# Altium PCB Skumpad.PcbDoc
Units mm, origin at the board's own origin, x right, y up, seen from the top; angles counter-clockwise.
Board outline 102 x 102 mm, 2 copper layers (Top Layer, Bottom Layer); 93 components, 46 nets, 234 pads, 0 vias.
Unrouted connection lines stored in the file: 120.
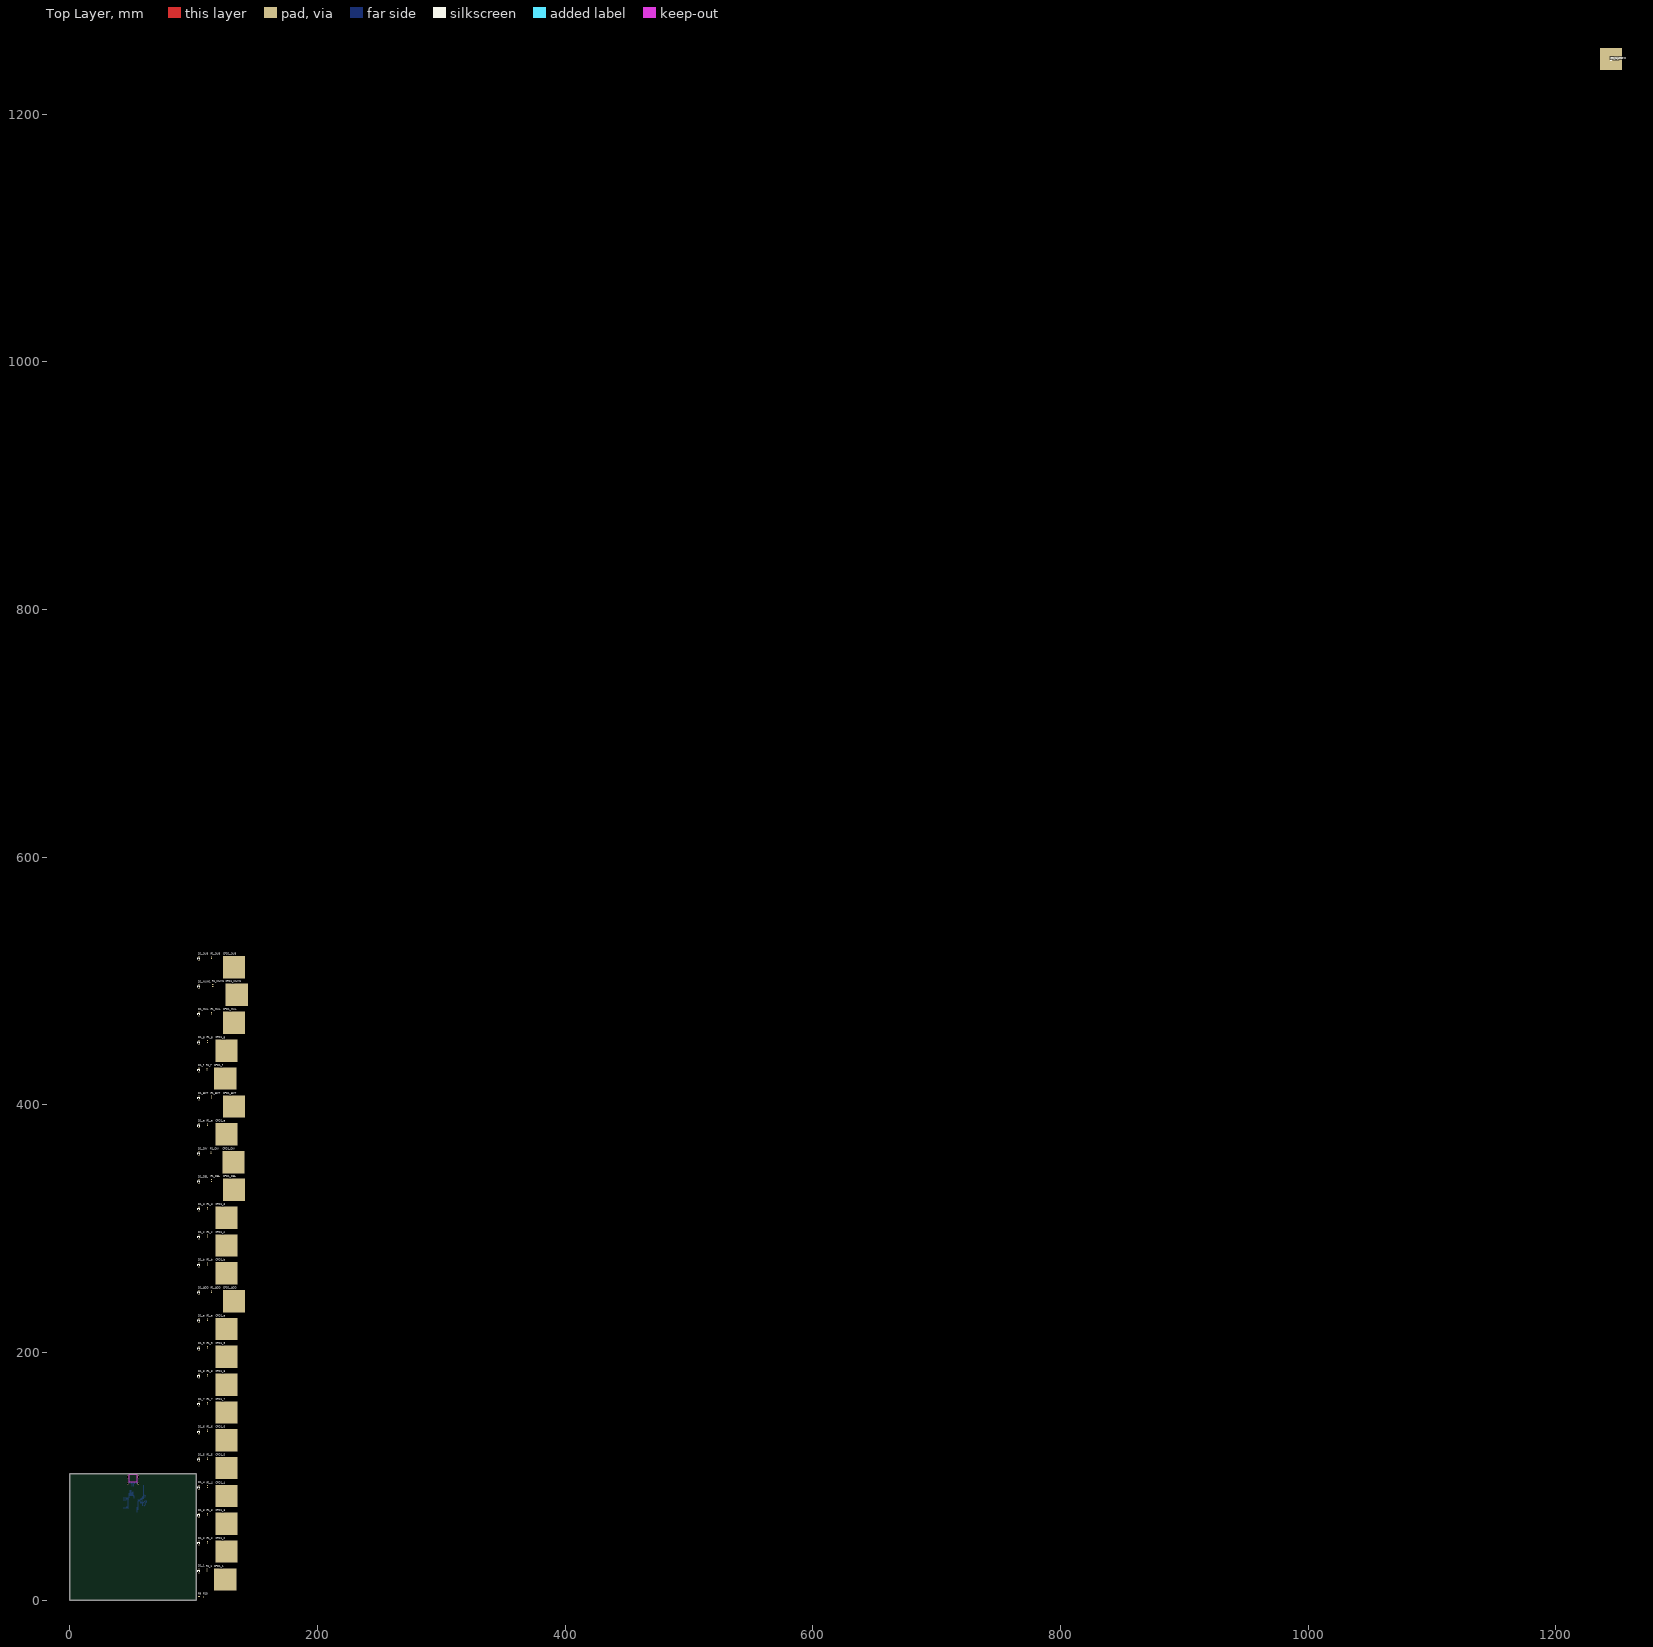
[diagram p0: Top Layer view]
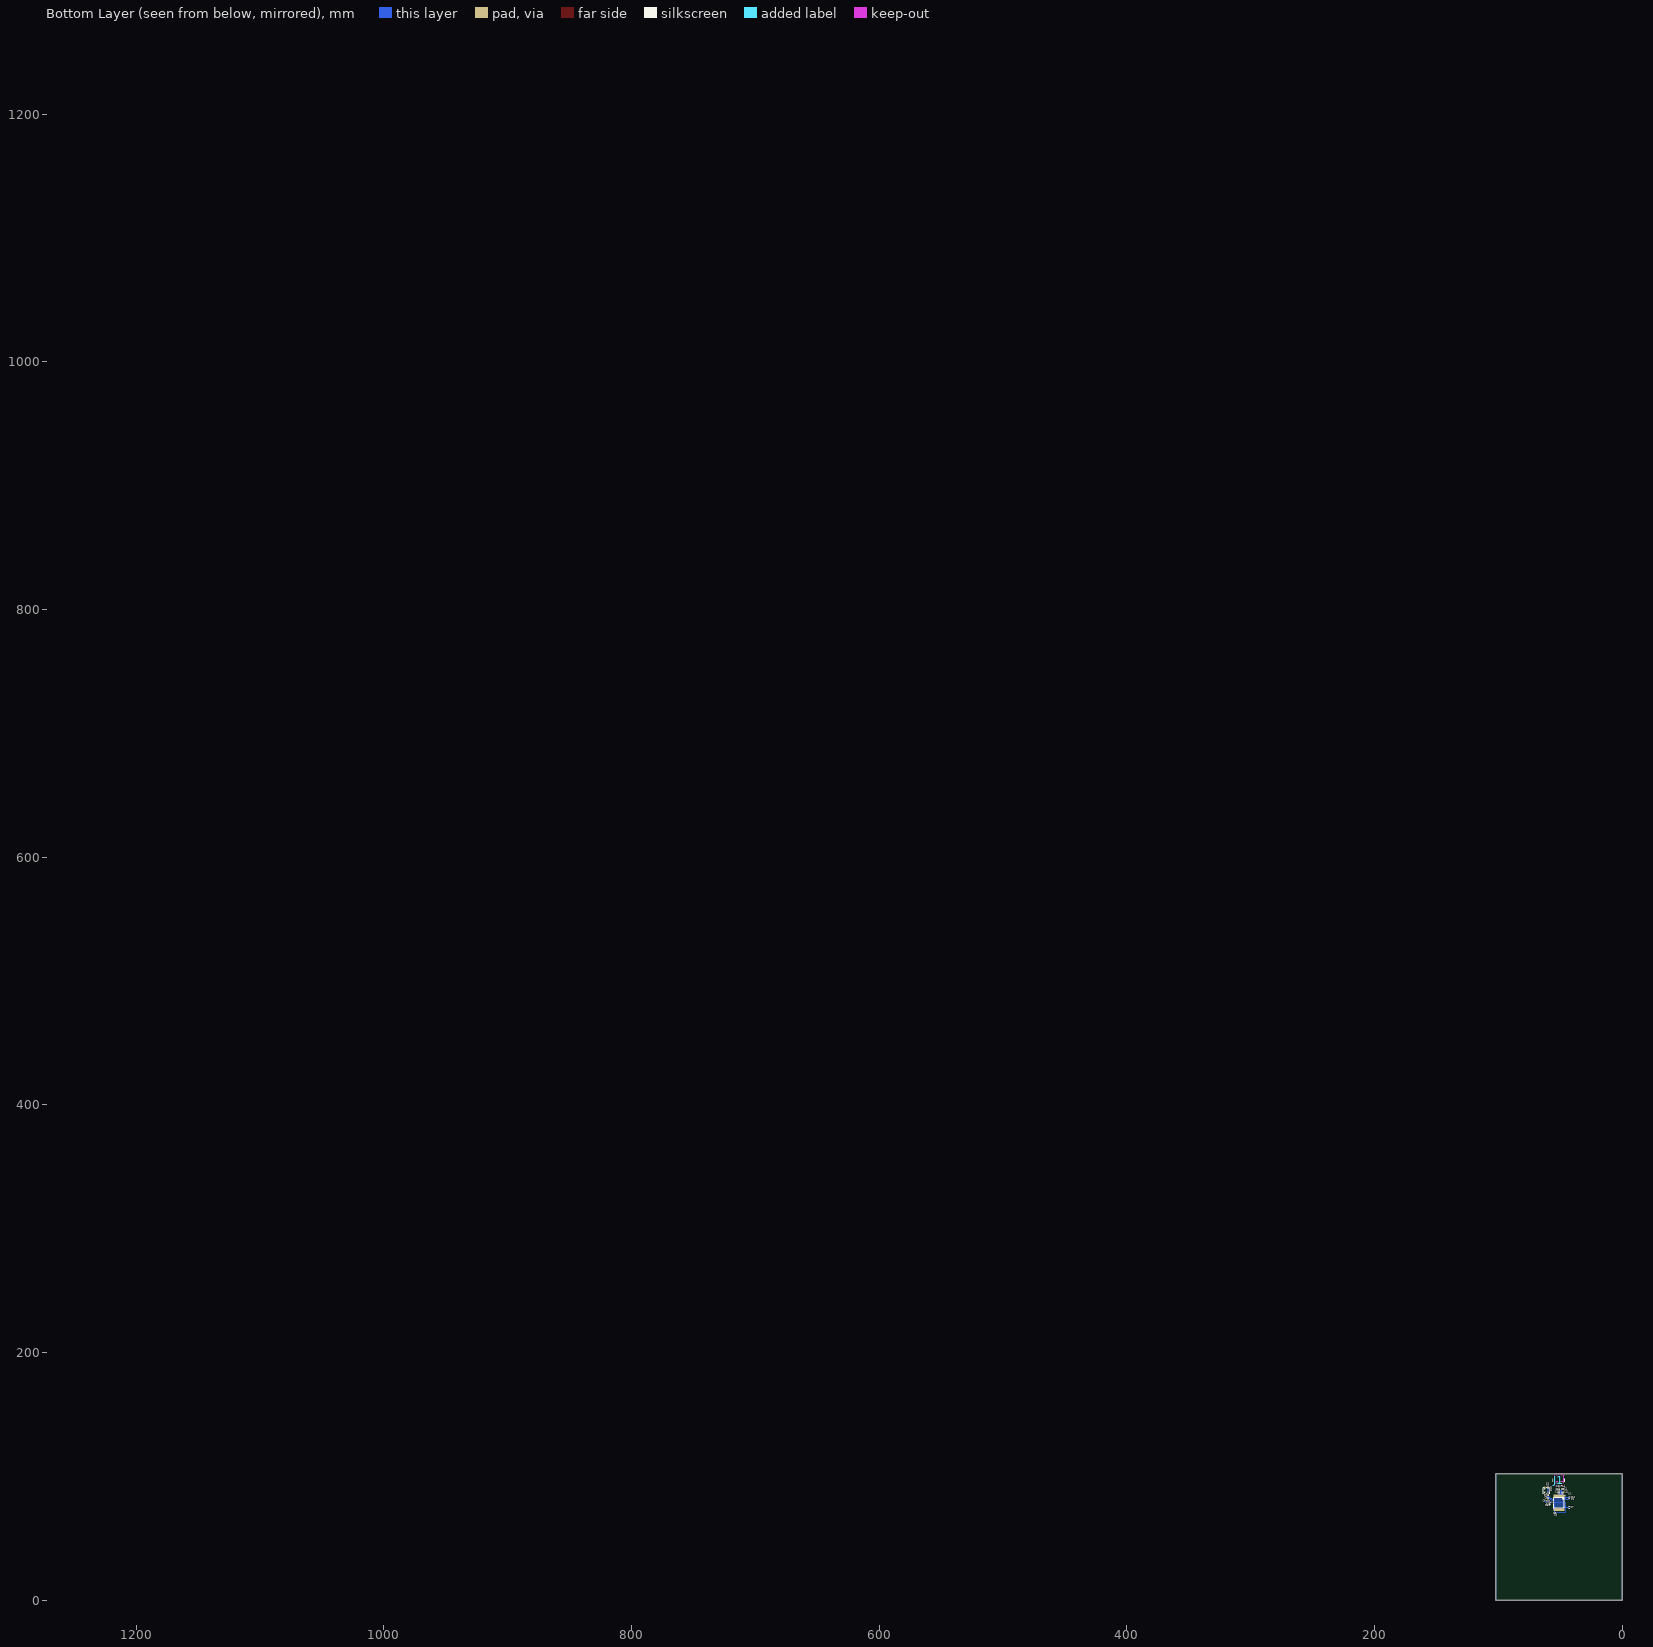
[diagram p1: Bottom Layer view, seen from below]

## Layer stack, top to bottom
Top Solder: solder mask 0.0102, Solder Resist, Dk 3.5
Top Layer: signal copper 0.0356
Dielectric 1: dielectric 0.32, FR-4, Dk 4.8
Bottom Layer: signal copper 0.0356
Bottom Solder: solder mask 0.0102, Solder Resist, Dk 3.5

## Board outline
0,0 0,102 102,102 102,0

## Design rules (kind name [scope] priority, off if disabled: settings)
Clearance [All] p1: gap=0.127 ignorepadtopadclearanceinfootprint=TRUE except(0: Arc-Hole Track-Hole SMDPad-Hole THPad-Hole Via-Hole Fill-Hole Poly-Hole Region-Hole Text-Hole; 0.254: SMDPad-SMDPad)
PolygonConnect [All] p1: connectstyle=Relief reliefconductorwidth=0.254 reliefentries=4 polygonreliefangle="90 Angle" airgapwidth=0.254
RoomDefinition SUB [InComponentClass('SUB')] p1: confinementstyle=ConfineIn formatcopy=TRUE lockcomponents=FALSE outline 103.1,501.999 141.8,501.999 141.8,523.299 103.1,523.299
RoomDefinition NUM2 [InComponentClass('NUM2')] p2: confinementstyle=ConfineIn formatcopy=TRUE lockcomponents=FALSE outline 1235.397,1235.397 1257.997,1235.397 1257.997,1253.797 1235.397,1253.797
RoomDefinition NUM1 [InComponentClass('NUM1')] p3: confinementstyle=ConfineIn formatcopy=TRUE lockcomponents=FALSE outline 103.1,479.599 143.9,479.599 143.9,500.799 103.1,500.799
RoomDefinition MUL [InComponentClass('MUL')] p4: confinementstyle=ConfineIn formatcopy=TRUE lockcomponents=FALSE outline 103.1,457.099 141.8,457.099 141.8,478.299 103.1,478.299
RoomDefinition g [InComponentClass('g')] p5: confinementstyle=ConfineIn formatcopy=TRUE lockcomponents=FALSE outline 103.1,434.399 135.7,434.399 135.7,455.799 103.1,455.799
RoomDefinition f [InComponentClass('f')] p6: confinementstyle=ConfineIn formatcopy=TRUE lockcomponents=FALSE outline 103.1,411.999 134.7,411.999 134.7,433.199 103.1,433.199
RoomDefinition ENT [InComponentClass('ENT')] p7: confinementstyle=ConfineIn formatcopy=TRUE lockcomponents=FALSE outline 103.1,389.499 141.8,389.499 141.8,410.699 103.1,410.699
RoomDefinition e [InComponentClass('e')] p8: confinementstyle=ConfineIn formatcopy=TRUE lockcomponents=FALSE outline 103.1,366.999 135.7,366.999 135.7,388.199 103.1,388.199
RoomDefinition DIV [InComponentClass('DIV')] p9: confinementstyle=ConfineIn formatcopy=TRUE lockcomponents=FALSE outline 103.1,344.499 141.3,344.499 141.3,365.799 103.1,365.799
RoomDefinition DEL [InComponentClass('DEL')] p10: confinementstyle=ConfineIn formatcopy=TRUE lockcomponents=FALSE outline 103.1,322.099 141.8,322.099 141.8,343.299 103.1,343.299
RoomDefinition d [InComponentClass('d')] p11: confinementstyle=ConfineIn formatcopy=TRUE lockcomponents=FALSE outline 103.1,299.599 135.7,299.599 135.7,320.799 103.1,320.799
RoomDefinition c [InComponentClass('c')] p12: confinementstyle=ConfineIn formatcopy=TRUE lockcomponents=FALSE outline 103.1,277.099 135.7,277.099 135.7,298.399 103.1,298.399
RoomDefinition b [InComponentClass('b')] p13: confinementstyle=ConfineIn formatcopy=TRUE lockcomponents=FALSE outline 103.1,254.699 135.7,254.699 135.7,275.899 103.1,275.899
RoomDefinition ADD [InComponentClass('ADD')] p14: confinementstyle=ConfineIn formatcopy=TRUE lockcomponents=FALSE outline 103.1,232.199 141.8,232.199 141.8,253.399 103.1,253.399
RoomDefinition a [InComponentClass('a')] p15: confinementstyle=ConfineIn formatcopy=TRUE lockcomponents=FALSE outline 103.1,209.7 135.7,209.7 135.7,230.899 103.1,230.899
RoomDefinition 9 [InComponentClass('9')] p16: confinementstyle=ConfineIn formatcopy=TRUE lockcomponents=FALSE outline 103.1,187.3 135.7,187.3 135.7,208.5 103.1,208.5
RoomDefinition 8 [InComponentClass('8')] p17: confinementstyle=ConfineIn formatcopy=TRUE lockcomponents=FALSE outline 103.1,164.8 135.7,164.8 135.7,186 103.1,186
RoomDefinition 7 [InComponentClass('7')] p18: confinementstyle=ConfineIn formatcopy=TRUE lockcomponents=FALSE outline 103.1,142.3 135.7,142.3 135.7,163.5 103.1,163.5
RoomDefinition 6 [InComponentClass('6')] p19: confinementstyle=ConfineIn formatcopy=TRUE lockcomponents=FALSE outline 103.1,119.8 135.7,119.8 135.7,141.1 103.1,141.1
RoomDefinition 5 [InComponentClass('5')] p20: confinementstyle=ConfineIn formatcopy=TRUE lockcomponents=FALSE outline 103.1,97.4 135.7,97.4 135.7,118.6 103.1,118.6
RoomDefinition 4 [InComponentClass('4')] p21: confinementstyle=ConfineIn formatcopy=TRUE lockcomponents=FALSE outline 103.1,74.9 135.7,74.9 135.7,96.1 103.1,96.1
RoomDefinition 3 [InComponentClass('3')] p22: confinementstyle=ConfineIn formatcopy=TRUE lockcomponents=FALSE outline 103.1,52.4 135.7,52.4 135.7,73.7 103.1,73.7
RoomDefinition 2 [InComponentClass('2')] p23: confinementstyle=ConfineIn formatcopy=TRUE lockcomponents=FALSE outline 103.1,30 135.7,30 135.7,51.2 103.1,51.2
RoomDefinition 1 [InComponentClass('1')] p24: confinementstyle=ConfineIn formatcopy=TRUE lockcomponents=FALSE outline 103.1,7.5 134.7,7.5 134.7,28.7 103.1,28.7
RoomDefinition Skumpad [InComponentClass('Skumpad')] p25: confinementstyle=ConfineIn formatcopy=TRUE lockcomponents=FALSE outline 103.2,1.5 352.399,1.5 352.399,18.8 103.2,18.8
RoutingVias [All] p1: holewidth=0.711 width=1.27 viastyle="Through Hole" minholewidth=0.711 minwidth=1.27 maxholewidth=0.711 maxwidth=1.27
SolderMaskExpansion [All] p1: expansion=0.102 istentingtop=FALSE
Width Width_1 [All] p1: maxlimit=1.27 minlimit=0.127 preferedwidth=0.254 minimp=50.000000 maximp=50.000000 favimp=50.000000
30 further rules are at their usual default settings.

## Classes and differential pairs
channel class CSensor: 1 2 3 4 5 6 7 8 9 a ADD b c d DEL DIV e ENT f g MUL NUM1 NUM2 SUB
component class SUB: CPD1_SUB D1_SUB R1_SUB
component class NUM2: CPD1_NUM2 D1_NUM2 R1_NUM2
component class NUM1: CPD1_NUM1 D1_NUM1 R1_NUM1
component class MUL: CPD1_MUL D1_MUL R1_MUL
component class g: CPD1_g D1_g R1_g
component class f: CPD1_f D1_f R1_f
component class e: CPD1_e D1_e R1_e
component class ENT: CPD1_ENT D1_ENT R1_ENT
component class d: CPD1_d D1_d R1_d
component class DIV: CPD1_DIV D1_DIV R1_DIV
component class DEL: CPD1_DEL D1_DEL R1_DEL
component class c: CPD1_c D1_c R1_c
component class b: CPD1_b D1_b R1_b
component class a: CPD1_a D1_a R1_a
component class ADD: CPD1_ADD D1_ADD R1_ADD
component class 9: CPD1_9 D1_9 R1_9
component class 8: CPD1_8 D1_8 R1_8
component class 7: CPD1_7 D1_7 R1_7
component class 6: CPD1_6 D1_6 R1_6
component class 5: CPD1_5 D1_5 R1_5
component class 4: CPD1_4 D1_4 R1_4
component class 3: CPD1_3 D1_3 R1_3
component class 2: CPD1_2 D1_2 R1_2
component class 1: CPD1_1 D1_1 R1_1
component class Skumpad: 1 C1 C2 C3 C4 C5 C6 C7 C8 C9 C10 C11 C12 J1 R7 R9 R10 R12 R14 SW1 U1

## Components (designator, comment, footprint, x,y, rotation, side; value= is the part's Value field where it differs from the comment)
1 "16MCR" XTAL16M 59.865,79.179 r90 bottom
C1 "100nF" CAPC1050X55X23ML05T13 42.515,81.021 r0 bottom
C2 "100nF" CAPC1050X55X23ML05T13 60.291,92.886 r0 bottom
C3 "47pF" FP-C0402-BB-MFG 51,89.26 r270 bottom value="47 pF"
C4 "47pF" FP-C0402-BB-MFG 47.721,89.66 r90 bottom value="47 pF"
C5 "22pF" CAPC1005X56X25NL10T15 62.09,79.831 r270 bottom
C6 "22pF" CAPC1005X56X25NL10T15 59.422,76.343 r180 bottom
C7 "100nF" FP-C0402-BB-MFG 42.769,74.598 r180 bottom value="0.10 μF"
C8 "100nF" FP-C0402-BB-MFG 54.206,70.348 r270 bottom value="0.10 μF"
C9 "100nF" FP-C0402-BB-MFG 59.865,82.169 r0 bottom value="0.10 μF"
C10 "100nF" FP-C0402-BB-MFG 50.987,86.899 r90 bottom value="0.10 μF"
C11 "100nF" FP-C0402-BB-MFG 47.824,86.876 r90 bottom value="0.10 μF"
C12 "100nF" FP-C0402-BB-MFG 42.705,82.615 r180 bottom value="0.10 μF"
CPD1_1 "CPAD" CPAD 125.5,16.7 r0 top (schematic designator CPD1)
CPD1_2 "CPAD" CPAD 126.5,39.2 r0 top (schematic designator CPD1)
CPD1_3 "CPAD" CPAD 126.5,61.6 r0 top (schematic designator CPD1)
CPD1_4 "CPAD" CPAD 126.5,84.1 r0 top (schematic designator CPD1)
CPD1_5 "CPAD" CPAD 126.5,106.6 r0 top (schematic designator CPD1)
CPD1_6 "CPAD" CPAD 126.5,129 r0 top (schematic designator CPD1)
CPD1_7 "CPAD" CPAD 126.5,151.5 r0 top (schematic designator CPD1)
CPD1_8 "CPAD" CPAD 126.5,174 r0 top (schematic designator CPD1)
CPD1_9 "CPAD" CPAD 126.5,196.5 r0 top (schematic designator CPD1)
CPD1_a "CPAD" CPAD 126.5,218.9 r0 top (schematic designator CPD1)
CPD1_ADD "CPAD" CPAD 132.6,241.399 r0 top (schematic designator CPD1)
CPD1_b "CPAD" CPAD 126.5,263.899 r0 top (schematic designator CPD1)
CPD1_c "CPAD" CPAD 126.5,286.299 r0 top (schematic designator CPD1)
CPD1_d "CPAD" CPAD 126.5,308.799 r0 top (schematic designator CPD1)
CPD1_DEL "CPAD" CPAD 132.6,331.299 r0 top (schematic designator CPD1)
CPD1_DIV "CPAD" CPAD 132.1,353.699 r0 top (schematic designator CPD1)
CPD1_e "CPAD" CPAD 126.5,376.199 r0 top (schematic designator CPD1)
CPD1_ENT "CPAD" CPAD 132.6,398.699 r0 top (schematic designator CPD1)
CPD1_f "CPAD" CPAD 125.5,421.199 r0 top (schematic designator CPD1)
CPD1_g "CPAD" CPAD 126.5,443.599 r0 top (schematic designator CPD1)
CPD1_MUL "CPAD" CPAD 132.6,466.299 r0 top (schematic designator CPD1)
CPD1_NUM1 "CPAD" CPAD 134.7,488.799 r0 top (schematic designator CPD1)
CPD1_NUM2 "CPAD" CPAD 1244.587,1244.587 r0 top (schematic designator CPD1)
CPD1_SUB "CPAD" CPAD 132.6,511.199 r0 top (schematic designator CPD1)
D1_1 "1N4148WS" DIOD-SOD123-2_V 104.2,23.6 r90 top (schematic designator D1)
D1_2 "1N4148WS" DIOD-SOD123-2_V 104.2,46 r90 top (schematic designator D1)
D1_3 "1N4148WS" DIOD-SOD123-2_V 104.2,68.5 r90 top (schematic designator D1)
D1_4 "1N4148WS" DIOD-SOD123-2_V 104.2,91 r90 top (schematic designator D1)
D1_5 "1N4148WS" DIOD-SOD123-2_V 104.2,113.4 r90 top (schematic designator D1)
D1_6 "1N4148WS" DIOD-SOD123-2_V 104.2,135.9 r90 top (schematic designator D1)
D1_7 "1N4148WS" DIOD-SOD123-2_V 104.2,158.4 r90 top (schematic designator D1)
D1_8 "1N4148WS" DIOD-SOD123-2_V 104.2,180.8 r90 top (schematic designator D1)
D1_9 "1N4148WS" DIOD-SOD123-2_V 104.2,203.3 r90 top (schematic designator D1)
D1_a "1N4148WS" DIOD-SOD123-2_V 104.2,225.799 r90 top (schematic designator D1)
D1_ADD "1N4148WS" DIOD-SOD123-2_V 104.2,248.299 r90 top (schematic designator D1)
D1_b "1N4148WS" DIOD-SOD123-2_V 104.2,270.699 r90 top (schematic designator D1)
D1_c "1N4148WS" DIOD-SOD123-2_V 104.2,293.199 r90 top (schematic designator D1)
D1_d "1N4148WS" DIOD-SOD123-2_V 104.2,315.699 r90 top (schematic designator D1)
D1_DEL "1N4148WS" DIOD-SOD123-2_V 104.2,338.099 r90 top (schematic designator D1)
D1_DIV "1N4148WS" DIOD-SOD123-2_V 104.2,360.599 r90 top (schematic designator D1)
D1_e "1N4148WS" DIOD-SOD123-2_V 104.2,383.099 r90 top (schematic designator D1)
D1_ENT "1N4148WS" DIOD-SOD123-2_V 104.2,405.499 r90 top (schematic designator D1)
D1_f "1N4148WS" DIOD-SOD123-2_V 104.2,427.999 r90 top (schematic designator D1)
D1_g "1N4148WS" DIOD-SOD123-2_V 104.2,450.399 r90 top (schematic designator D1)
D1_MUL "1N4148WS" DIOD-SOD123-2_V 104.2,473.199 r90 top (schematic designator D1)
D1_NUM1 "1N4148WS" DIOD-SOD123-2_V 104.2,495.599 r90 top (schematic designator D1)
D1_NUM2 "1N4148WS" DIOD-SOD123-2_V 1244.587,1244.587 r0 top (schematic designator D1)
D1_SUB "1N4148WS" DIOD-SOD123-2_V 104.2,518.099 r90 top (schematic designator D1)
J1 "USBC" FP-1054500101-MFG 51,97.536 r0 bottom
R1_1 "560K" RESC1608X55X30NL15T15 110.7,24.3 r90 top (schematic designator R1)
R1_2 "560K" RESC1608X55X30NL15T15 111.2,46.8 r90 top (schematic designator R1)
R1_3 "560K" RESC1608X55X30NL15T15 111.2,69.3 r90 top (schematic designator R1)
R1_4 "560K" RESC1608X55X30NL15T15 111.2,91.7 r90 top (schematic designator R1)
R1_5 "560K" RESC1608X55X30NL15T15 111.2,114.2 r90 top (schematic designator R1)
R1_6 "560K" RESC1608X55X30NL15T15 111.2,136.7 r90 top (schematic designator R1)
R1_7 "560K" RESC1608X55X30NL15T15 111.2,159.1 r90 top (schematic designator R1)
R1_8 "560K" RESC1608X55X30NL15T15 111.2,181.6 r90 top (schematic designator R1)
R1_9 "560K" RESC1608X55X30NL15T15 111.2,204.1 r90 top (schematic designator R1)
R1_a "560K" RESC1608X55X30NL15T15 111.2,226.499 r90 top (schematic designator R1)
R1_ADD "560K" RESC1608X55X30NL15T15 114.3,248.999 r90 top (schematic designator R1)
R1_b "560K" RESC1608X55X30NL15T15 111.2,271.499 r90 top (schematic designator R1)
R1_c "560K" RESC1608X55X30NL15T15 111.2,293.999 r90 top (schematic designator R1)
R1_d "560K" RESC1608X55X30NL15T15 111.2,316.399 r90 top (schematic designator R1)
R1_DEL "560K" RESC1608X55X30NL15T15 114.3,338.899 r90 top (schematic designator R1)
R1_DIV "560K" RESC1608X55X30NL15T15 114,361.399 r90 top (schematic designator R1)
R1_e "560K" RESC1608X55X30NL15T15 111.2,383.799 r90 top (schematic designator R1)
R1_ENT "560K" RESC1608X55X30NL15T15 114.3,406.299 r90 top (schematic designator R1)
R1_f "560K" RESC1608X55X30NL15T15 110.7,428.799 r90 top (schematic designator R1)
R1_g "560K" RESC1608X55X30NL15T15 111.2,451.199 r90 top (schematic designator R1)
R1_MUL "560K" RESC1608X55X30NL15T15 114.3,473.899 r90 top (schematic designator R1)
R1_NUM1 "560K" RESC1608X55X30NL15T15 115.3,496.399 r90 top (schematic designator R1)
R1_NUM2 "560K" RESC1608X55X30NL15T15 1244.587,1244.587 r0 top (schematic designator R1)
R1_SUB "560K" RESC1608X55X30NL15T15 114.3,518.899 r90 top (schematic designator R1)
R7 "10K" RESC1005X40X25NL05T05 60.9,83.839 r90 bottom
R9 "5.1K" RESC1005X40X25NL10T10 104.2,3 r0 top
R10 "5.1K" RESC1005X40X25NL10T10 108.1,2.6 r90 top
R12 "22" RESC1005X40X25LL05T05 51.49,91.701 r90 bottom
R14 "22" RESC1005X40X25LL05T05 50.499,91.701 r90 bottom
SW1 "7914G-1-000E" BOUR-7914G-1-000E_V 61.1,88.4 r0 bottom
U1 "ATmega32U4-AU" 44ML_M 51,78.6 r270 bottom

## Footprints (in the part's own frame and the unit in brackets; to place one, negate y for a bottom-side part, rotate by r counter-clockwise, add the part's x,y. Pads: shape width x height; smd on the part's side, far side on the other; paste and mask are expansions set on the pad)
44ML_M [mm] "Thin QFP, 44-Leads, Body 10x10mm, Pitch 0.8mm, IPC Low Density"
  oval 2.05x0.6 smd: 1(-5.7,4) 2(-5.7,3.2) 3(-5.7,2.4) 4(-5.7,1.6) 5(-5.7,0.8) 6(-5.7,0) 7(-5.7,-0.8) 8(-5.7,-1.6) 9(-5.7,-2.4) 10(-5.7,-3.2) 11(-5.7,-4) 23(5.7,-4) 24(5.7,-3.2) 25(5.7,-2.4) 26(5.7,-1.6) 27(5.7,-0.8) 28(5.7,0) 29(5.7,0.8) 30(5.7,1.6) 31(5.7,2.4) 32(5.7,3.2) 33(5.7,4)
  oval 0.6x2.05 smd: 12(-4,-5.7) 13(-3.2,-5.7) 14(-2.4,-5.7) 15(-1.6,-5.7) 16(-0.8,-5.7) 17(0,-5.7) 18(0.8,-5.7) 19(1.6,-5.7) 20(2.4,-5.7) 21(3.2,-5.7) 22(4,-5.7) 34(4,5.7) 35(3.2,5.7) 36(2.4,5.7) 37(1.6,5.7) 38(0.8,5.7) 39(0,5.7) 40(-0.8,5.7) 41(-1.6,5.7) 42(-2.4,5.7) 43(-3.2,5.7) 44(-4,5.7)
  silkscreen extent -5.82,-4.25 4.25,4.97, body extent -5,-5 5,5, height 1.2
BOUR-7914G-1-000E_V [mm] "SMD, 4-Leads, Body 5x5mm, Height 4.49mm"
  rect 1.27x1.27 smd: 1(-1.27,2.75) 2(1.27,2.75) 3(1.27,-2.75) 4(-1.27,-2.75)
  silkscreen extent -2.5,-2.5 2.5,4.06, body extent -2.5,-3.1 2.5,3.1, height 4.11
CAPC1005X56X25NL10T15 [mm] "Chip Capacitor, 2-Leads, Body 1.00x0.50mm, IPC Medium Density"
  rect 0.68x0.64 smd: 1(-0.44,0) 2(0.44,0)
  body extent -0.55,-0.3 0.55,0.3, height 0.56
CAPC1050X55X23ML05T13 [mm] "Chip Capacitor, 2-Leads, Body 1.05x0.55mm, IPC Low Density"
  rect 0.76x0.72 smd: 1(-0.49,0) 2(0.49,0)
  body extent -0.53,-0.28 0.53,0.27, height 0.55
CPAD [mm]
  rect 18x18 smd paste-9 mask+0.102: 1(0,0)
DIOD-SOD123-2_V [mm] "SOD123, 2-Leads, Body 2.7x1.55mm, Height 1.45mm"
  rect 0.9x0.95 smd: 1(-1.575,0) 2(1.575,0)
  silkscreen extent -0.64,-0.83 0.64,0.77, body extent -1.35,-0.77 1.35,0.77, height 1.45
FP-1054500101-MFG [mm]
  rrect100% 1.1x2.1 hole 1.6 slot 0.6 at 0 deg paste-1000 mask+0: 1(-4.32,3.36) 2(4.32,3.36)
  rrect100% 1.1x2.6 hole 2.1 slot 0.6 at 0 deg paste-1000 mask+0: 3(-4.32,-2) 4(4.32,-2)
  rect 0.3x0.7 smd paste+0 mask+0: A1(-3,3.77) A2(-2.5,3.77) A3(-2,3.77) A4(-1.5,3.77) A5(-1,3.77) A6(-0.5,3.77) A7(0.5,3.77) A8(1,3.77) A9(1.5,3.77) A10(2,3.77) A11(2.5,3.77) A12(3,3.77) B2(2.25,2.47) B3(1.75,2.47) B4(1.25,2.47) B5(0.75,2.47) B6(0.25,2.47) B7(-0.25,2.47) B8(-0.75,2.47) B9(-1.25,2.47) B10(-1.75,2.47) B11(-2.25,2.47)
  rect 1x0.7 smd paste+0 mask+0: B1(3.1,2.47) B12(-3.1,2.47)
  Keep-Out Layer region: -3.5,1.88 3.5,1.88 3.5,-3.77 -3.5,-3.77
  silkscreen extent -4.57,-0.3 4.57,1.9
FP-C0402-BB-MFG [mm]
  rect 0.52x0.52 smd paste+0 mask+0: 1(-0.4,0) 2(0.4,0)
  silkscreen extent -0.5,-0.64 0.5,0.64, body extent -0.5,-0.25 0.5,0.25, height 0.55
RESC1005X40X25LL05T05 [mm] "Chip Resistor, 2-Leads, Body 1.00x0.50mm, IPC High Density"
  rect 0.45x0.45 smd: 1(-0.4,0) 2(0.4,0)
  body extent -0.53,-0.27 0.53,0.28, height 0.4
RESC1005X40X25NL05T05 [mm] "Chip Resistor, 2-Leads, Body 1.00x0.50mm, IPC Medium Density"
  rect 0.55x0.55 smd: 1(-0.45,0) 2(0.45,0)
  body extent -0.53,-0.27 0.53,0.28, height 0.4
RESC1005X40X25NL10T10 [mm] "Chip Resistor, 2-Leads, Body 1.00x0.50mm, IPC Medium Density"
  rect 0.65x0.6 smd: 1(-0.425,0) 2(0.425,0)
  body extent -0.55,-0.3 0.55,0.3, height 0.4
RESC1608X55X30NL15T15 [mm] "Chip Resistor, 2-Leads, Body 1.60x0.80mm, IPC Medium Density"
  rect 0.8x0.95 smd: 1(-0.675,0) 2(0.675,0)
  body extent -0.87,-0.48 0.87,0.48, height 0.55
XTAL16M [mm] "A 16Mhz crystal resonator footprint, JLCPCB #C13738"
  rect 1.4x1.2 smd: 1(-1.1,-0.85) 2(1.1,-0.85) 3(1.1,0.85) 4(-1.1,0.85)
  silkscreen extent -2.12,-1.78 -0.34,-0.22

## Part data
1: "16Mhz crystal resonator, JLCPCB #C13738"
C1 C2: library part CMP-2000-05439-1, "Chip Capacitor, 100 nF, +/- 10%, 16 V, -55 to 125 degC, 0402 (1005 Metric), RoHS, Tape and Reel", Capacitance=100000pF, Case Size/Dimension=0402, Dielectric=X7R, Manufacturer="Samsung Electro-Mechanics", Rated Voltage=16V, Tolerance (%)=±10%, Datasheet URL=https://datasheet.ciiva.com/29198/458718-da-01-en-vs-kondensator-0402-29198423.pdf, Datasheet Version=Nov-10, Manufacturer URL=http://www.samsungsem.com/global/index.jsp
C3 C4: library part CMP-2008-03283-2, "CAP CER 47PF 50V C0G/NP0 0402", Capacitance="47 pF", Manufacturer=Kemet, Manufacturer Part Number=C0402C470J5GACTU, Package=C0402-BB, Temperature="-55°C to +125°C", Temperature Characteristic=C0G, Temperature Coefficient=15%, Temperature Range High=+125°C, Temperature Range Low=-55°C, Tolerance=0.05, Voltage Rating="50 V", Automotive=No, Category=Cap, ComponentLink2Description=Datasheet, ComponentLink2URL=https://content.kemet.com/datasheets/KEM_C1002_X7R_SMD.pdf, Device Class L1="Passive Components", Device Class L2=Capacitors, Device Class L3="Ceramic Capacitors", Digikey Description="CAP CER 47PF 50V C0G/NP0 0402", Height=0.55mm, Ipc Land Pattern Name=CAPC10050X50, Lead Free=Yes, Material=Ceramic, Mouser Description="Multilayer Ceramic Capacitors MLCC - SMD/SMT 50volts 47pF C0G 5%", Octopart=https://octopart.com/c0402c470j5gactu-kemet-134668, RoHS=TRUE
C5 C6: library part CMP-2008-02613-1, Manufacturer="AVX Interconnect / Elco", Part Number=04025A220JAT2A
C7 C8 C9 C10 C11 C12: library part CMP-03020-023811-1, "CAP CER 0.1UF 10V X5R 0402", Capacitance="0.10 μF", Manufacturer=Kemet, Manufacturer Part Number=C0402C104K8PACTU, Package=C0402-BB, Temperature="-55°C to +125°C", Temperature Characteristic=X5R, Temperature Coefficient=15%, Temperature Range High=+125°C, Temperature Range Low=-55°C, Tolerance=0.1, Voltage Rating="10 V", Automotive=No, Category=Cap, ComponentLink2Description=Datasheet, ComponentLink2URL=https://content.kemet.com/datasheets/KEM_C1002_X7R_SMD.pdf, Device Class L1="Passive Components", Device Class L2=Capacitors, Device Class L3="Ceramic Capacitors", Digikey Description="CAP CER 0.1UF 10V X5R 0402", Height=0.55mm, Ipc Land Pattern Name=CAPC10050X50, Lead Free=Yes, Material=Ceramic, Mouser Description="Capacitor 100 nF 10 VDC 0402", Octopart=https://octopart.com/c0402c104k8pactu-kemet-140039, RoHS=TRUE
D1_1 D1_2 D1_3 D1_4 D1_5 D1_6 D1_7 D1_8 D1_9 D1_a D1_ADD D1_b D1_c D1_d D1_DEL D1_DIV D1_e D1_ENT D1_f D1_g D1_MUL D1_NUM1 D1_NUM2 D1_SUB: library part CMP-2000-04932-2, "Fast Switching Diode, 100 V, 0.15 A, -65 to 150 degC, 2-Pin?SOD123, RoHS, Tape and Reel", If - Forward Current=0.15A, Ir - Reverse Current=1uA, Manufacturer=DiodesIncorporated, Max Surge Current=2A, Maximum Operating Temperature=+150C, Minimum Operating Temperature=-65C, Operating Temperature Range=-65Cto+150C, Package / Case=SOD-123, Package Reference=SOD123-2, Peak Reverse Voltage=100V, Vf - Forward Voltage=1.25V, Brand=DiodesIncorporated, Configuration=Single, Datasheet URL=http://www.farnell.com/datasheets/1915529.pdf, Datasheet Version="Rev. 24-2, 10/2013", Factory Pack Quantity=3000, Height=1.25mm, Length=2.85mm, Manufacturer URL=http://www.diodes.com/, Mounting Style=SMD/SMT, Package URL=http://www.diodes.com/datasheets/ds18004.pdf, Packaging=Reel, Product=SwitchingDiodes, Product Category=Diodes-GeneralPurpose,Power,Switching, Recovery Time=4ns, RoHS=True, Series=1N4148, Type=SwitchingDiode, Unit Weight=0.000353oz, Width=1.7mm
J1: library part CMP-04767-000004-1, "CONN RCP USB3.1 TYPEC 24P SMD RA", Current Rating=0.25/1.25/5A, Manufacturer=Molex, Manufacturer Part Number=1054500101, Package=0, Temperature="-30°C to +85°C", Temperature Range High=+85°C, Temperature Range Low=-30°C, Voltage Rating=30V, Automotive=No, Category=Conn, ComponentLink2Description=Datasheet, ComponentLink2URL=https://www.molex.com/webdocs/datasheets/pdf/en-us/1054500101_IO_CONNECTORS.pdf, Conn Orientation="Right Angle", Contact Material=Gold,Nickel, Device Class L1=Connectors, Device Class L2="USB Connectors", Device Class L3=unset, Digikey Description="CONN RCP USB3.1 TYPEC 24P SMD RA", Footprint Url=https://www.molex.com/pdm_docs/sd/1054500101_sd.pdf, Height=3.44mm, Is Female=yes, Lead Free=Yes, Mouser Description="USB Shielded I/O Receptacle; Type C; Right Angle; Surface Mount; Gold over Nickel", Number Of Contacts=24, Octopart=https://octopart.com/105450-0101-molex-68082325, Pitch=0.5mm, RoHS=TRUE, Shielding=true, Usb Standard="USB 3.1"
R1_1 R1_2 R1_3 R1_4 R1_5 R1_6 R1_7 R1_8 R1_9 R1_a R1_ADD R1_b R1_c R1_d R1_DEL R1_DIV R1_e R1_ENT R1_f R1_g R1_MUL R1_NUM1 R1_NUM2 R1_SUB: library part CMP-2000-00567-1, Manufacturer=Panasonic, Part Number=ERJ3EKF5603V
R7: library part CMP-2002-01183-1, Manufacturer=Panasonic, Part Number=ERT-J0ER103J
R9 R10: library part CMP-2002-05812-1, Manufacturer=Panasonic, Part Number=ERA-2AEB512X
R12 R14: library part CMP-2002-08382-1, Manufacturer="Vishay Dale", Part Number=CRCW040222R0FKED
SW1: library part CMP-2000-05692-1, "SPST Gull Wing Sealed Key Switch, 100 mA, 16 V, -55 to 125 degC, 4-Pin SMD, RoHS, Tape and Reel", Actuator Color=N/A, Contact Rating @ Voltage=0.1A, Dielectric Strength=250VAC, Manufacturer=Bourns, Maximum AC Voltage Rating=16V, Maximum Contact Resistance=100mOhm, Minimum Insulation Resistance=100MOhm, Operating Force=2.94N, Operating Temperature=-55to125C, Package Description="4-Pin Surface Mount Device, Body 5 x 5 mm, Height 4.49 mm", Actuator Length=1.65mm, Actuator Style=RoundButton, Base Material=Thermoplastic, Body Orientation=Straight, Contact Material=Gold, Contact Plating=N/A, COO=TW, Datasheet URL=http://www.bourns.com/docs/Product-Datasheets/7914.pdf, Datasheet Version=08/2016, Dimension=5x6.2x4.19mm, ECCN=EAR99, Electrical Life=N/A, Family=7914, Ground Terminal=No, Housing Material=N/A, HTS=8536509065, Illumination Type=N/R, Manufacturer URL=http://www.bourns.com/, Maximum DC Voltage Rating=16V, Mechanical Life=100000Cycles, Mounting=SurfaceMount,GullWing, Mounting Technology=SurfaceMount, Package Reference=7914G-1-000E, Packaging=EmbossedTapeandReel, Part No=7914G-1-000E, Pole Throw Configuration=SPST, Product Weight=N/A, RoHS=Yes, Seal Description=N/A, Seal Location=N/A, Supplier=Bourns, Switch Configuration=N.O., Type=KeySwitch
U1: library part CMP-0095-00285-2, "8-bit AVR Microcontroller, 2.7-5.5V, 16MHz, 32KB Flash, 1KB EEPROM, 2.5KB SRAM, USB Controller, 44-pin TQFP, Industrial Grade (-40°C to 85°C), Ext Osc", ComponentLink1Description="Manufacturer URL", ComponentLink1URL=http://www.atmel.com/, ComponentLink2Description="ATmega16U4/32U4 Datasheet", ComponentLink2URL=http://www.atmel.com/dyn/resources/prod_documents/doc7766.pdf, ComponentLink3Description="ATmega16U4 ATmega32U4 Summary", ComponentLink3URL=http://www.atmel.com/dyn/resources/prod_documents/7766S.pdf, DatasheetVersion="revF, Nov-2010", PackageDescription="44-Pin Plastic Thin Quad Flat Pack, 10 x 10 x 1.0 mm Body, 0.8 mm Pitch (TQFP)", PackageReference=44ML, PackageVersion="rev.G, Jul-2007", RevisionNote="DatasheetVersion updated. URLs added."

## Nets (pads, with @x,y where several pads share a name; then routed paths per layer and width w, separated by ;. In a path a pad name is that pad's centre, name@x,y a point inside that pad or via, vN(x,y) a via of type N, cw(c..) or ccw(c..) an arc to the next point about the centre after c; other vN are vias at no path point)
GND: 1.2 1.4 C1.1 C2.2 C3.2 C4.1 C5.2 C6.1 C7.2 C8.2 C9.2 C10.2 C11.2 C12.2 J1.1 J1.2 J1.3 J1.4 J1.A1 J1.A12 J1.B1 J1.B12 R9.2 R10.2 SW1.2 SW1.3 U1.5 U1.15 U1.23 U1.35 U1.43 | length 31
  Bottom Layer w0.127: J1.B12 48,94.966 J1.A1 ; J1.A12 54,94.966 J1.B1
  Bottom Layer w0.254: U1.35 46.75,75.4 47.189,75.839 47.189,81.348 46.737,81.8 U1.43 ; J1.1 J1.B12@47.57,95.066 ; U1.5 50.2,86.591 50.812,87.203 C10.2@50.987,87.378 ; C10.2@50.854,87.161 C10.2@50.854,87.166 ; J1.B1@54.43,95.066 J1.2 ; U1.23 55,79.722 55.478,80.2 U1.15 ; 1.2@58.715,79.979 1.2 ; C6.1 1.4@61.1,77.58 ; 1.4@60.778,78.079 C5.2
Net1_1: 1.1 C6.2 U1.17 | length 4.3
  Bottom Layer w0.254: U1.17 58.542,78.6 59.003,78.138 1.1@59.003,78.068 ; C6.2 58.982,78.047 1.1@59.003,78.068 ; 1.1 1.1@59.003,78.068
Net1_3: 1.3 C5.1 U1.16 | length 6
  Bottom Layer w0.254: U1.16 57.519,79.4 57.743,79.176 59.711,79.176 60.715,80.179 1.3 60.723,80.271 C5.1
NetC1_2: C1.2 U1.42 | length 2.3
  Bottom Layer w0.254: C1.2 43.015,81.01 45.29,81.01 U1.42
NetC2_1: C2.1 R7.2 SW1.1 SW1.4 U1.13 | length 12.9
  Bottom Layer w0.127: U1.13 57.55,81.8 59.83,84.08 SW1.1
  Bottom Layer w0.254: C2.1 59.801,91.179 SW1.4 SW1.1
NetC3_1: C3.1 R12.1 U1.3 | length 4.6
  Bottom Layer w0.127: U1.3 48.6,88.854
NetC4_2: C4.2 R14.1 U1.4 | length 4.3
  Bottom Layer w0.127: U1.4 49.4,88.578
NetCPD1_1_1: CPD1_1.1 D1_1.1 R1_1.1
NetCPD1_2_1: CPD1_2.1 D1_2.1 R1_2.1
NetCPD1_3_1: CPD1_3.1 D1_3.1 R1_3.1
NetCPD1_4_1: CPD1_4.1 D1_4.1 R1_4.1
NetCPD1_5_1: CPD1_5.1 D1_5.1 R1_5.1
NetCPD1_6_1: CPD1_6.1 D1_6.1 R1_6.1
NetCPD1_7_1: CPD1_7.1 D1_7.1 R1_7.1
NetCPD1_8_1: CPD1_8.1 D1_8.1 R1_8.1
NetCPD1_9_1: CPD1_9.1 D1_9.1 R1_9.1
NetCPD1_a_1: CPD1_a.1 D1_a.1 R1_a.1
NetCPD1_ADD_1: CPD1_ADD.1 D1_ADD.1 R1_ADD.1
NetCPD1_b_1: CPD1_b.1 D1_b.1 R1_b.1
NetCPD1_c_1: CPD1_c.1 D1_c.1 R1_c.1
NetCPD1_d_1: CPD1_d.1 D1_d.1 R1_d.1
NetCPD1_DEL_1: CPD1_DEL.1 D1_DEL.1 R1_DEL.1
NetCPD1_DIV_1: CPD1_DIV.1 D1_DIV.1 R1_DIV.1
NetCPD1_e_1: CPD1_e.1 D1_e.1 R1_e.1
NetCPD1_ENT_1: CPD1_ENT.1 D1_ENT.1 R1_ENT.1
NetCPD1_f_1: CPD1_f.1 D1_f.1 R1_f.1
NetCPD1_g_1: CPD1_g.1 D1_g.1 R1_g.1
NetCPD1_MUL_1: CPD1_MUL.1 D1_MUL.1 R1_MUL.1
NetCPD1_NUM1_1: CPD1_NUM1.1 D1_NUM1.1 R1_NUM1.1
NetCPD1_NUM2_1: CPD1_NUM2.1 D1_NUM2.1 R1_NUM2.1
NetCPD1_SUB_1: CPD1_SUB.1 D1_SUB.1 R1_SUB.1
NetD1_1_2: D1_1.2 D1_2.2 D1_3.2 D1_b.2 D1_ENT.2 U1.37
NetD1_4_2: D1_4.2 D1_5.2 D1_6.2 D1_a.2 D1_g.2 U1.38
NetD1_7_2: D1_7.2 D1_8.2 D1_9.2 D1_ADD.2 D1_NUM1.2 U1.39
NetD1_c_2: D1_c.2 D1_d.2 D1_DEL.2 D1_e.2 D1_f.2 U1.36
NetD1_DIV_2: D1_DIV.2 D1_MUL.2 D1_NUM2.2 D1_SUB.2 U1.40
NetJ1_A5: J1.A5 R10.1
NetJ1_A6: J1.A6 J1.B6 R14.2 | length 3.3
  Bottom Layer w0.127: R14.2 R14.2 J1.A6 51.25,94.516 J1.B6
NetJ1_A7: J1.A7 J1.B7 R12.2 | length 1.7
  Bottom Layer w0.127: R12.2 51.5,92.11 J1.A7
NetJ1_B5: J1.B5 R9.1
NetR1_1_2: R1_1.2 R1_4.2 R1_7.2 R1_d.2 R1_DIV.2 U1.30
NetR1_2_2: R1_2.2 R1_5.2 R1_8.2 R1_e.2 U1.29
NetR1_3_2: R1_3.2 R1_6.2 R1_9.2 R1_f.2 R1_MUL.2 U1.28
NetR1_a_2: R1_a.2 R1_b.2 R1_c.2 R1_NUM1.2 R1_NUM2.2 U1.31
NetR1_ADD_2: R1_ADD.2 R1_DEL.2 R1_ENT.2 R1_g.2 R1_SUB.2 U1.27
VCC: C7.1 C8.1 C9.1 C10.1 C11.1 C12.1 J1.A4 J1.A9 J1.B4 J1.B9 R7.1 U1.2 U1.6 U1.7 U1.14 U1.24 U1.34 U1.44 | length 30.8
  Bottom Layer w0.127: C7.1 C7.1@43.171,74.6 ; J1.A4@49.497,93.769 49.497,94.304 49.75,94.556 J1.B9 ; J1.B4 52.25,94.556 52.503,94.304 52.503,93.769 J1.A9
  Bottom Layer w0.254: C12.1 43.112,82.607 45.293,82.607 U1.44 ; C7.1@43.171,74.6 U1.34 ; U1.2 47.812,84.312 47.812,86.463 C11.1 ; C10.1 50.994,86.492 50.994,84.306 U1.6 ; U1.24 54.203,72.897 54.203,70.751 C8.1 ; U1.14@57.493,80.862 59.065,82.434 ; C9.1 59.2,82.434 59.065,82.434 ; R7.1 60.02,83.389 59.132,82.501 59.065,82.434
  Bottom Layer w0.381: U1.34 47.4,74.6 ; U1.44 47.4,82.6 ; 47.8,82.6 U1.2 ; 51.8,82.2 U1.7 ; U1.24@54.203,72.897 54.203,74.997 ; 54.6,81 U1.14
pads on no net: J1.A2 J1.A3 J1.A8 J1.A10 J1.A11 J1.B2 J1.B3 J1.B8 J1.B10 J1.B11 U1.1 U1.8 U1.9 U1.10 U1.11 U1.12 U1.18 U1.19 U1.20 U1.21 U1.22 U1.25 U1.26 U1.32 U1.33 U1.41
copper on no net: | length 2.6
  Bottom Layer w0.254: 47.57,95.066 47.9,95.066 ; 50.987,87.378 50.987,87.424 ; 59.917,85.266 60.894,84.289 60.9,84.289 ; 60.715,78.079 60.778,78.079 ; 62.09,79.35 62.09,79.391 ; 54.1,95.066 54.43,95.066 54.1,95.066
  Bottom Layer w0.381: 62.026,79.391 62.09,79.391

## Polygon pours and split planes (outlines as drawn)
VCC on Bottom Layer "VCC_L02_P033" (solid, pour order 33): 55.25,82.85 55.25,74.35 46.75,74.35 46.75,82.85
VCC on Bottom Layer "NONET_L02_P003" (solid, shelved, pour order 3): 45.95,79.15 45.95,70.65 54.45,70.65 54.45,79.15
GND on Bottom Layer "NONET_L02_P001" (solid, shelved, pour order 1): 0,102 102,102 102,0 0,0
GND on Bottom Layer "NONET_L02_P002" (hatched 45Degree grid 0.889 track 0.203, remove dead copper, shelved, pour order 2): 0,102 102,102 102,0 0,0

## Other copper
Bottom Layer:
  region net VCC: 51.779,83.54 51.779,85.07 50.979,85.07 50.979,83.54